# Altium PCB PCB_vierge_PETD.PcbDoc
Units mil, origin at the board's own origin, x right, y up, seen from the top; angles counter-clockwise.
Board outline 3000 x 4160 mil, 4 copper layers (Top Layer, Internal Plane 1, Internal Plane 2, Bottom Layer); 23 components, 39 nets, 93 pads, 0 vias.
Unrouted connection lines stored in the file: 45.
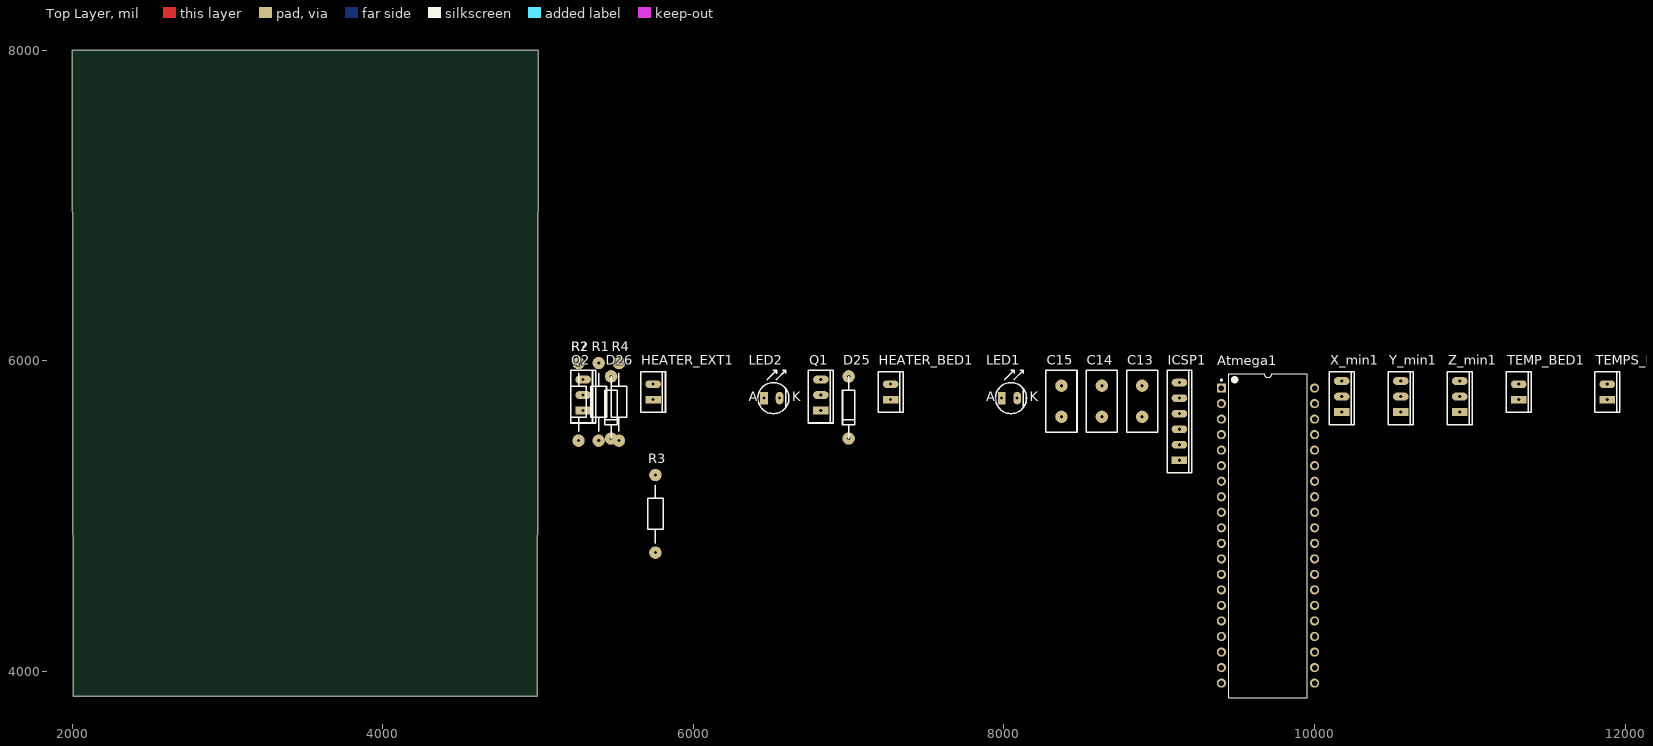
[diagram p0: Top Layer view]
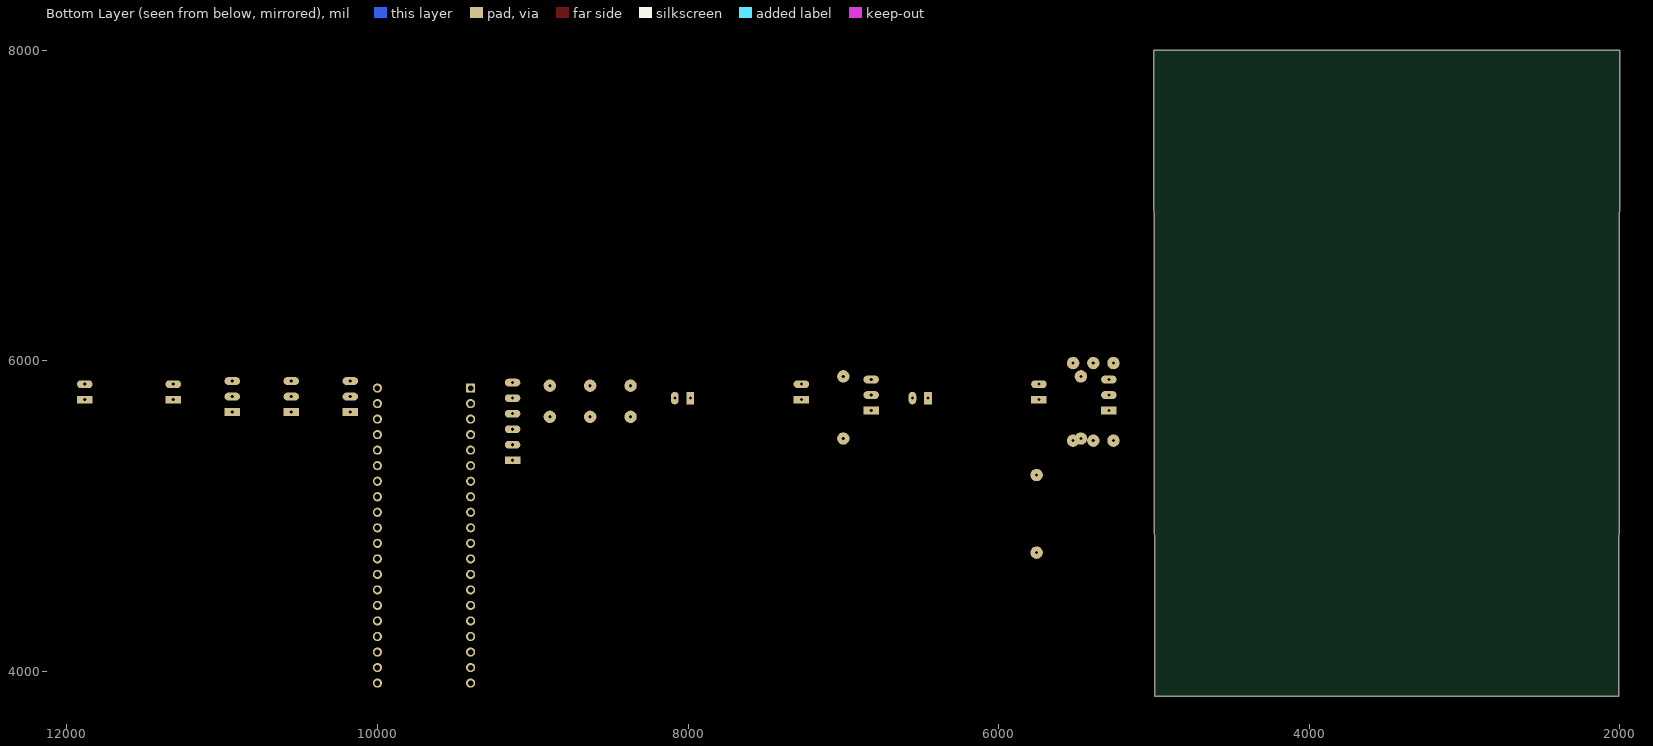
[diagram p1: Bottom Layer view, seen from below]
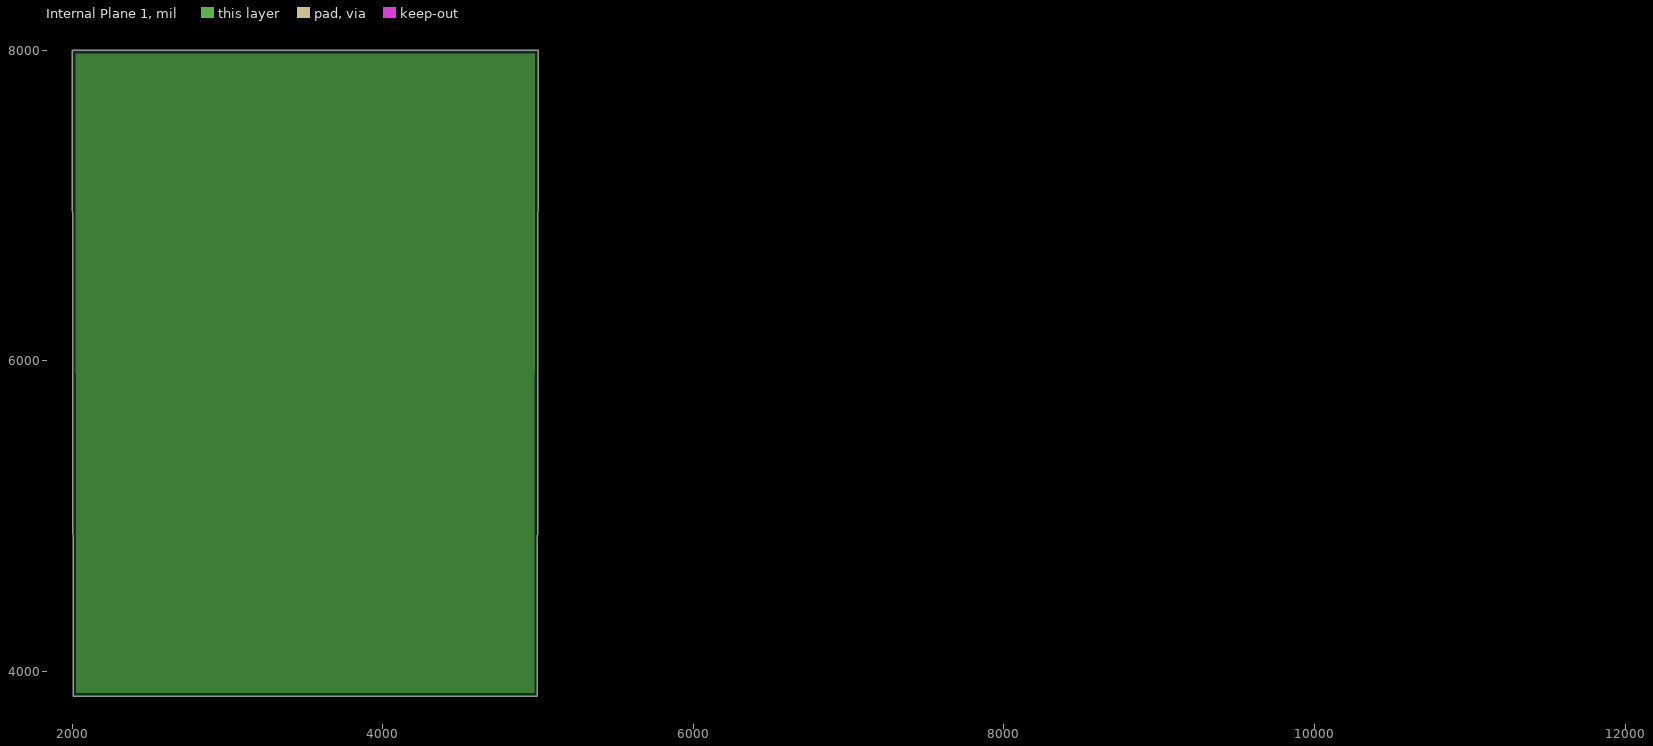
[diagram p2: Internal Plane 1, clearances drawn from the general rule]
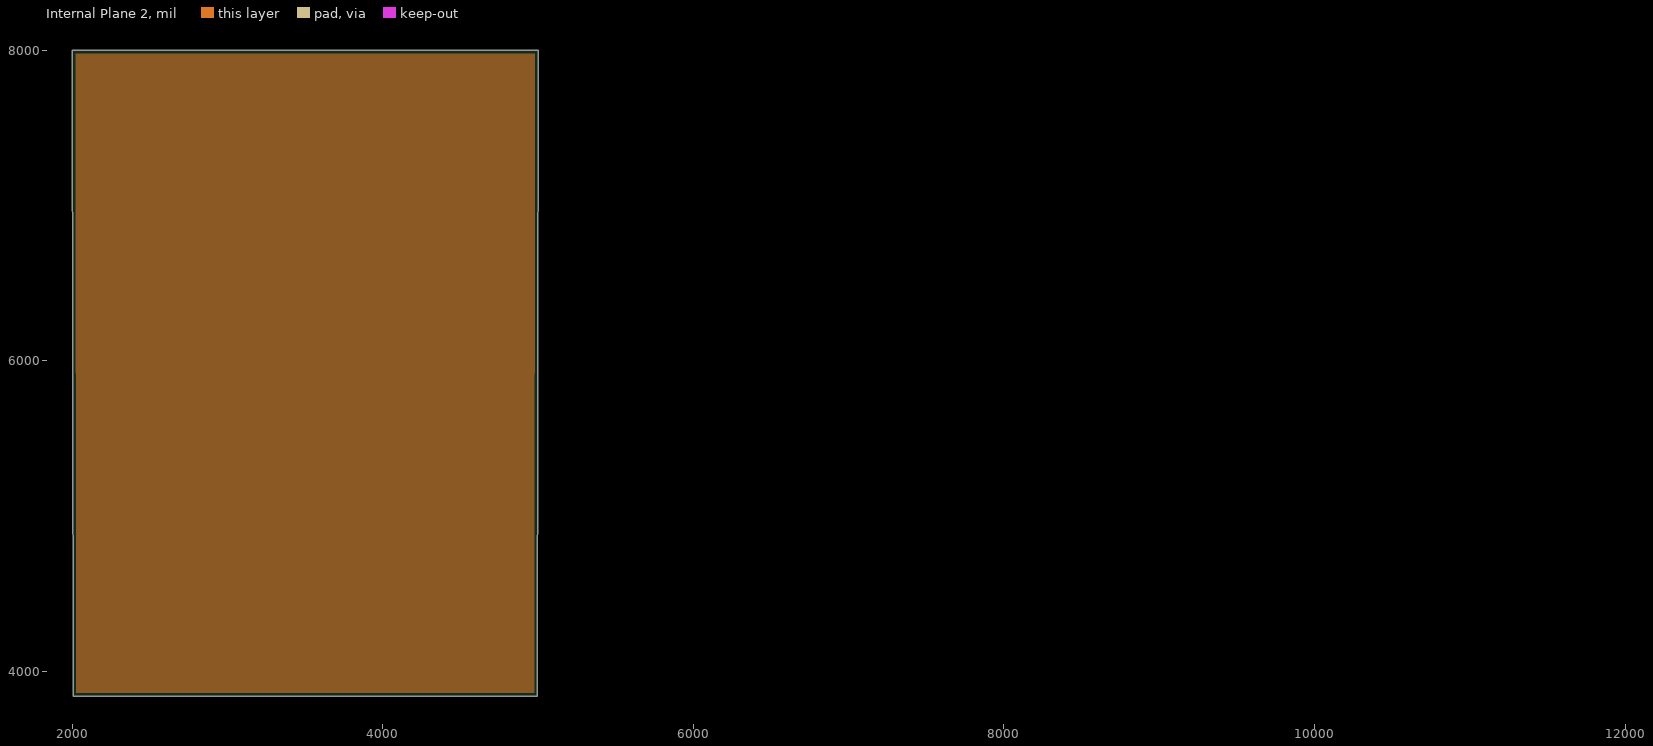
[diagram p3: Internal Plane 2, clearances drawn from the general rule]

## Layer stack, top to bottom
Top Layer: signal copper 1.4
Dielectric: dielectric 12.6, FR-4, Dk 4.8
Internal Plane 1: plane copper 1.4
Dielectric: dielectric 12.6, FR-4, Dk 4.8
Internal Plane 2: plane copper 1.4
Dielectric: dielectric 12.6, FR-4, Dk 4.8
Bottom Layer: signal copper 1.4

## Board outline
2005,3840 3505,3840 4995,3840 5000,8000 2000,8000

## Design rules (kind name [scope] priority, off if disabled: settings)
Clearance [All] p1: gap=13
FabricationTestPointUsage TestPointUsage [All] p1: valid=0 allowmultiple=FALSE
FabricationTestpoint Testpoint [All] p1: side=3 testpointundercomponent=TRUE minsize=40 maxsize=100 preferedsize=60 minholesize=0 maxholesize=40 preferedholesize=32 testpointgrid=1 allowsidetop=TRUE allowsidebottom=TRUE usegrid=TRUE gridtolerance=0.01
PlaneClearance [All] p1: clearance=20
PlaneConnect [All] p1: planeconnectstyle=Relief reliefexpansion=20 reliefentries=4 reliefconductorwidth=10 reliefairgap=10
PolygonConnect [All] p1: connectstyle=Relief reliefconductorwidth=30 reliefentries=4 polygonreliefangle="90 Angle" airgapwidth=10
RoutingLayers [All] p1: top layer_v5=FALSE bottom layer_v5=TRUE
RoutingPriority RoutingPriority_1 [All] p1: routingpriority=2
RoutingPriority [InNetClass('puissance')] p2: routingpriority=1
RoutingVias [All] p1: holewidth=20 width=80 viastyle="Through Hole" minholewidth=28 minwidth=50 maxholewidth=28 maxwidth=50
SilkscreenOverComponentPads [All] p1: minsilkscreentomaskgap=10
SolderMaskExpansion [All] p1: expansion=4
Width Width_puissance [InNetClass('Class puissance')] p1: maxlimit=40 minlimit=40 preferedwidth=40
Width Width_1 [All] p2: maxlimit=20 minlimit=20 preferedwidth=20
21 further rules are at their usual default settings.

## Components (designator, comment, footprint, x,y, rotation, side; value= is the part's Value field where it differs from the comment)
Atmega1 "ATmega644A-PU" 40P6 9700,4875 r0 top
C13 "Cap2" CAPA2 8890,5640 r90 top
C14 "Cap2" CAPA2 8630,5640 r90 top
C15 "Cap2" CAPA2 8370,5640 r90 top
D25 "Diode 1N4004" Ddiode 7000,5500 r90 top
D26 "Diode 1N4004" Ddiode 5470,5500 r90 top
HEATER_BED1 "CONKK2" CONKK2 7270,5750 r90 top
HEATER_EXT1 "CONKK2" CONKK2 5740,5750 r90 top
ICSP1 "CONKK6" CONKK6 9130,5360 r90 top
LED1 "Led" LED 7985,5760 r0 top
LED2 "Led" LED 6455,5760 r0 top
Q1 "CONKK3" CONKK3 6820,5680 r90 top
Q2 "CONKK3" CONKK3 5290,5680 r90 top
R1 "Res2" res5_1/4W 5390,5486 r90 top
R2 "Res2" res5_1/4W 5260,5486 r90 top
R3 "Res2" res5_1/4W 5755,4765 r90 top
R4 "Res2" res5_1/4W 5520,5486 r90 top
R? "Res2" res5_1/4W 5260,5486 r90 top
TEMP_BED1 "CONKK2" CONKK2 11315,5750 r90 top
TEMPS_EXT1 "CONKK2" CONKK2 11885,5750 r90 top
X_min1 "CONKK3" CONKK3 10175,5670 r90 top
Y_min1 "CONKK3" CONKK3 10555,5670 r90 top
Z_min1 "CONKK3" CONKK3 10935,5670 r90 top

## Footprints (in the part's own frame and the unit in brackets; to place one, negate y for a bottom-side part, rotate by r counter-clockwise, add the part's x,y. Pads: shape width x height; smd on the part's side, far side on the other; paste and mask are expansions set on the pad)
40P6 [mm] "DIP, 40-Leads, Row Spacing 15.24mm, Pitch 2.54mm, Body 52.2x13.95mm"
  rect 1.5x1.5 hole 0.9: 1(-7.62,24.13)
  round 1.5 hole 0.9: 2(-7.62,21.59) 3(-7.62,19.05) 4(-7.62,16.51) 5(-7.62,13.97) 6(-7.62,11.43) 7(-7.62,8.89) 8(-7.62,6.35) 9(-7.62,3.81) 10(-7.62,1.27) 11(-7.62,-1.27) 12(-7.62,-3.81) 13(-7.62,-6.35) 14(-7.62,-8.89) 15(-7.62,-11.43) 16(-7.62,-13.97) 17(-7.62,-16.51) 18(-7.62,-19.05) 19(-7.62,-21.59) 20(-7.62,-24.13) 21(7.62,-24.13) 22(7.62,-21.59) 23(7.62,-19.05) 24(7.62,-16.51) 25(7.62,-13.97) 26(7.62,-11.43) 27(7.62,-8.89) 28(7.62,-6.35) 29(7.62,-3.81) 30(7.62,-1.27) 31(7.62,1.27) 32(7.62,3.81) 33(7.62,6.35) 34(7.62,8.89) 35(7.62,11.43) 36(7.62,13.97) 37(7.62,16.51) 38(7.62,19.05) 39(7.62,21.59) 40(7.62,24.13)
  silkscreen extent -7.74,-26.5 6.45,26.5, body extent -7.05,-26.47 7.05,26.47, height 4.83
CAPA2 [mil]
  round 80 hole 20: 1(0,0) 2(200,0)
  silkscreen extent -100,-100 300,100
CONKK2 [mil]
  rect 50x100 hole 20: 1(0,0)
  oval 50x100 hole 20: 2(100,0)
  silkscreen extent -80,-80 180,80
CONKK3 [mil]
  rect 50x100 hole 20: 1(0,0)
  oval 50x100 hole 20: 2(100,0) 3(200,0)
  silkscreen extent -80,-80 260,80
CONKK6 [mil]
  rect 50x100 hole 20: 1(0,0)
  oval 50x100 hole 20: 2(100,0) 3(200,0) 4(300,0) 5(400,0) 6(500,0)
  silkscreen extent -80,-80 580,80
Ddiode [mil]
  round 80 hole 20: A(400,0) K(0,0)
  silkscreen extent 0,-40 400,40
LED [mil]
  rect 50x80 hole 20: 1(0,0)
  oval 50x80 hole 20: 2(100,0)
  silkscreen extent -40,-100 160,180
res5_1/4W [mil]
  round 80 hole 20: 1(0,0) 2(500,0)
  silkscreen extent 60,-50 435,50

## Part data
Atmega1: "8-bit AVR Microcontroller, 64KB Flash, 2KB EEPROM, 4KB SRAM, 40-pin PDIP, Industrial Grade (-40°C to 85°C)"
C13 C14 C15: "Capacitor"
D25 D26: "1 Amp General Purpose Rectifier"
LED1 LED2: "LED"
R1 R2 R3 R4 R?: "Resistor"

## Nets (pads, with @x,y where several pads share a name; then routed paths per layer and width w, separated by ;. In a path a pad name is that pad's centre, name@x,y a point inside that pad or via, vN(x,y) a via of type N, cw(c..) or ccw(c..) an arc to the next point about the centre after c; other vN are vias at no path point)
+12V: D25.K D26.K HEATER_BED1.1 HEATER_EXT1.1 R1.1 R3.1
"DIR X": 
"DIR Y": 
"DIR Z": 
DIR_E: Atmega1.24
DIR_X: Atmega1.37
DIR_Y: Atmega1.35
DIR_Z: Atmega1.28
ENABLE\: 
GND: Atmega1.11 Atmega1.31 C13.2 C14.1 C15.1 ICSP1.6 Q1.3 Q2.3 TEMP_BED1.2 TEMPS_EXT1.2 X_min1.2 Y_min1.2 Z_min1.2
"LOW CURRENT": 
MOSI: Atmega1.6 ICSP1.4
NetAtmega1_1: Atmega1.1 X_min1.1
NetAtmega1_2: Atmega1.2 Y_min1.1
NetAtmega1_3: Atmega1.3 Z_min1.1
NetAtmega1_4: Atmega1.4 R2.2
NetAtmega1_5: Atmega1.5 R4.2
NetAtmega1_7: Atmega1.7 ICSP1.1
NetAtmega1_12: Atmega1.12 C15.2
NetAtmega1_13: Atmega1.13 C14.2
NetD25_1: D25.A HEATER_BED1.2 LED1.2 Q1.2
NetD26_1: D26.A HEATER_EXT1.2 LED2.2 Q2.2
NetLED1_1: LED1.1 R1.2
NetLED2_1: LED2.1 R3.2
NetQ1_1: Q1.1 R2.1
NetQ2_1: Q2.1 R4.1
"REF X": 
"REF Y": 
"REF Z": 
RESET: Atmega1.9 ICSP1.5 R?.2
SCK: Atmega1.8 ICSP1.3
"STEP X": 
"STEP Y": 
"STEP Z": 
STEP_E: Atmega1.25
STEP_X: Atmega1.38
STEP_Y: Atmega1.36
STEP_Z: Atmega1.29
VCC: Atmega1.10 C13.1 ICSP1.2 R?.1 X_min1.3 Y_min1.3 Z_min1.3
pads on no net: Atmega1.14 Atmega1.15 Atmega1.16 Atmega1.17 Atmega1.18 Atmega1.19 Atmega1.20 Atmega1.21 Atmega1.22 Atmega1.23 Atmega1.26 Atmega1.27 Atmega1.30 Atmega1.32 Atmega1.33 Atmega1.34 Atmega1.39 Atmega1.40 TEMP_BED1.1 TEMPS_EXT1.1

## Polygon pours and split planes (outlines as drawn)
no net on Internal Plane 1 (split plane): 4974.93,3860.1 2025.07,3860.1 2020.12,7979.9 4979.88,7979.9
no net on Internal Plane 2 (split plane): 4974.93,3860.1 2025.07,3860.1 2020.12,7979.9 4979.88,7979.9

## Text inside footprints (layer, text, board x,y; h text height)
LED1: Top Overlay "K" at 8165,5740 h60; Top Overlay "A" at 7885,5740 h60
LED2: Top Overlay "K" at 6635,5740 h60; Top Overlay "A" at 6355,5740 h60